# Altium PCB protoboard.PcbDoc
Units mm, origin at the board's own origin, x right, y up, seen from the top; angles counter-clockwise.
Board outline 43.18 x 43.18 mm, 2 copper layers (Component Side, Bottom Layer), stack 0.325 mm thick; 58 components, 38 nets, 245 pads, 48 vias.
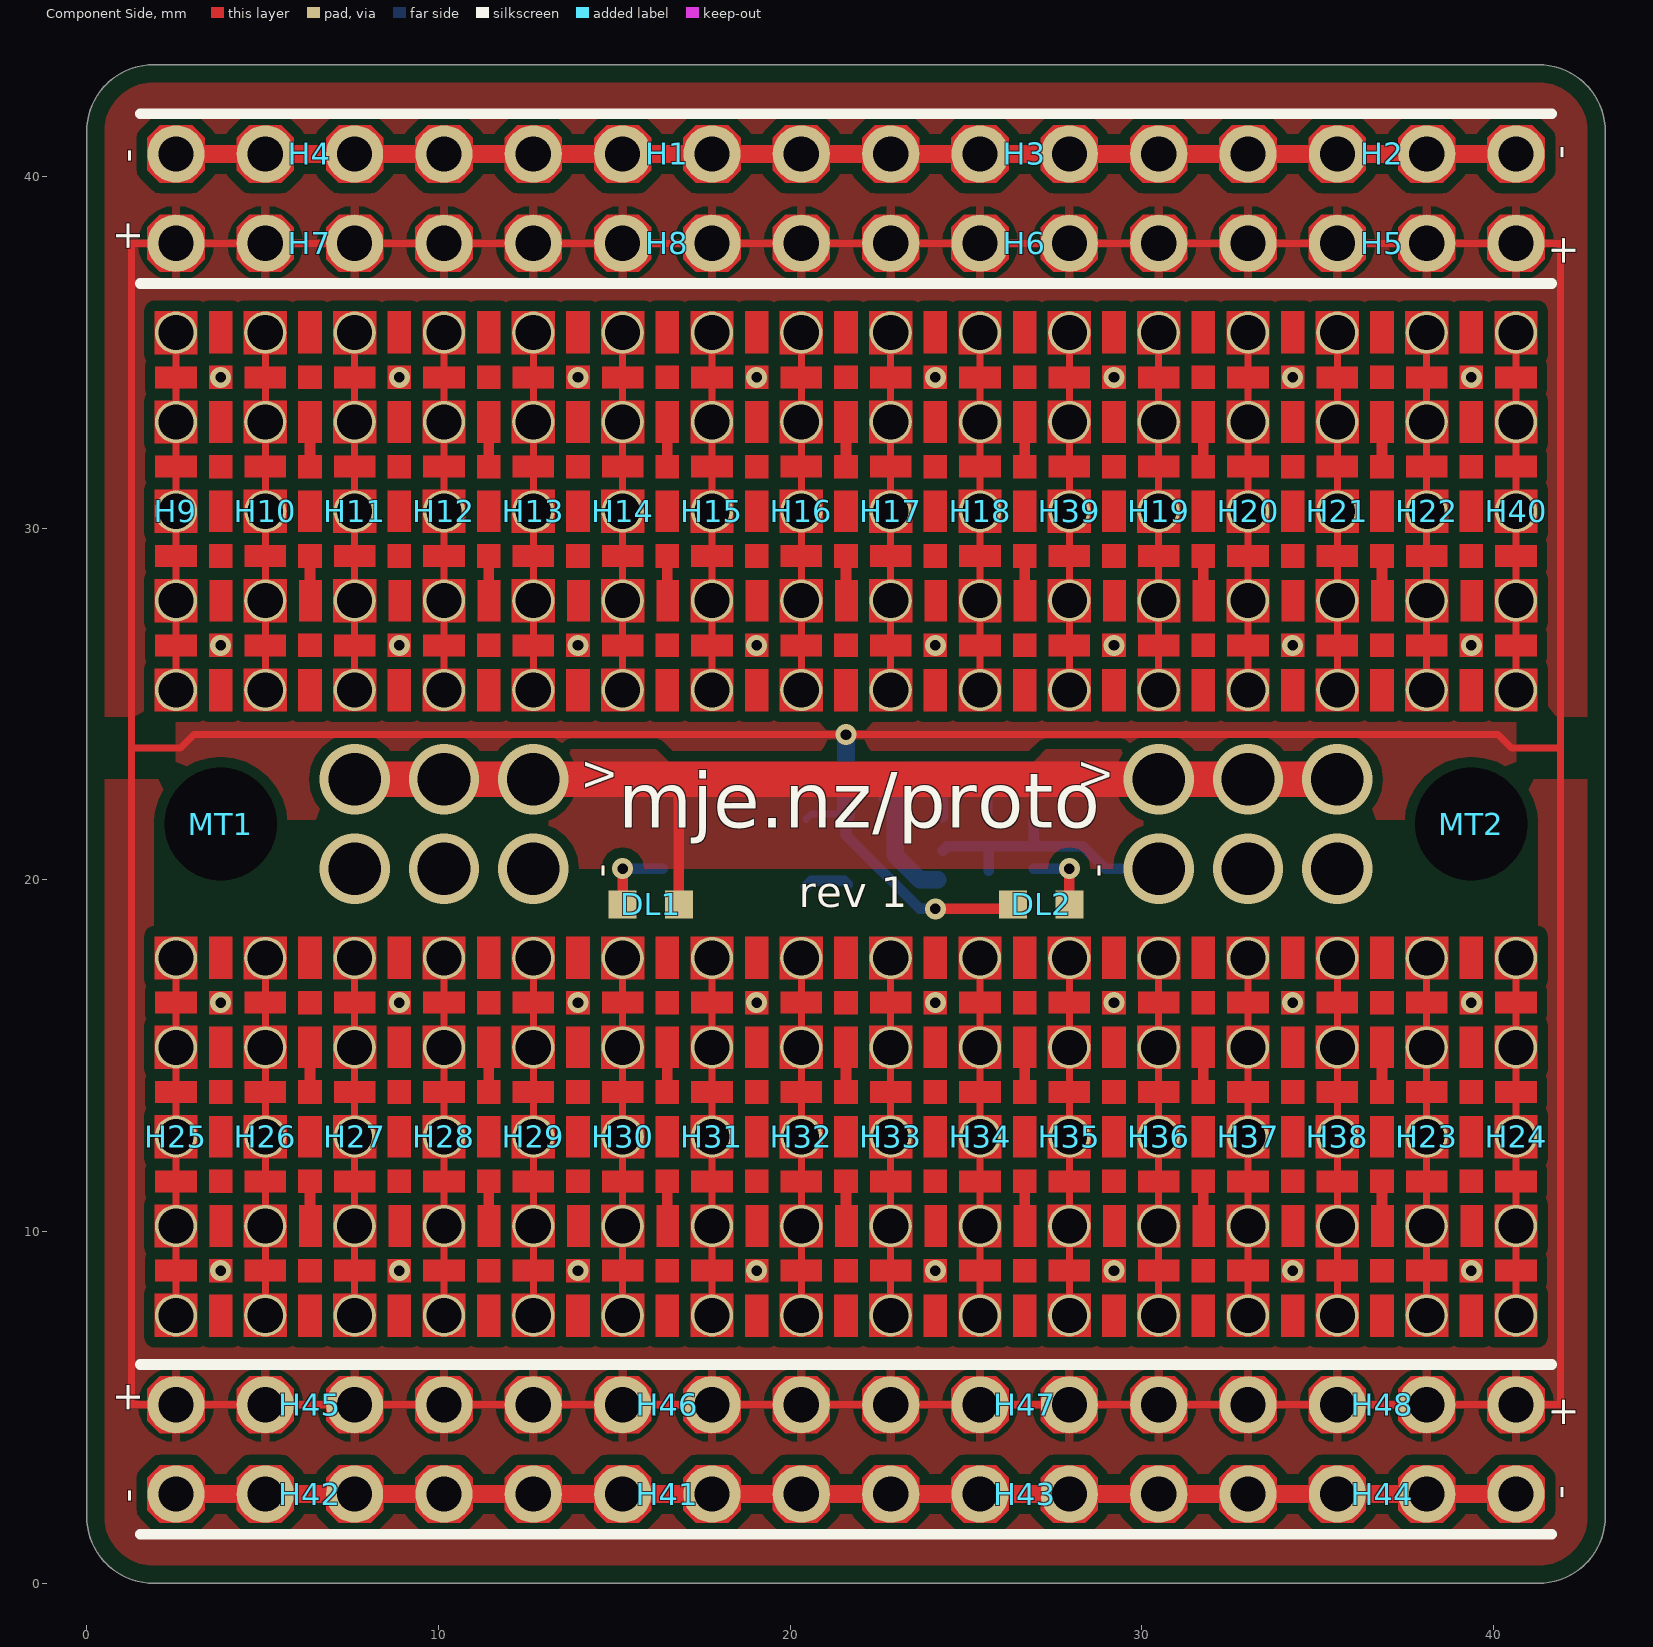
[diagram p0: Component Side view]
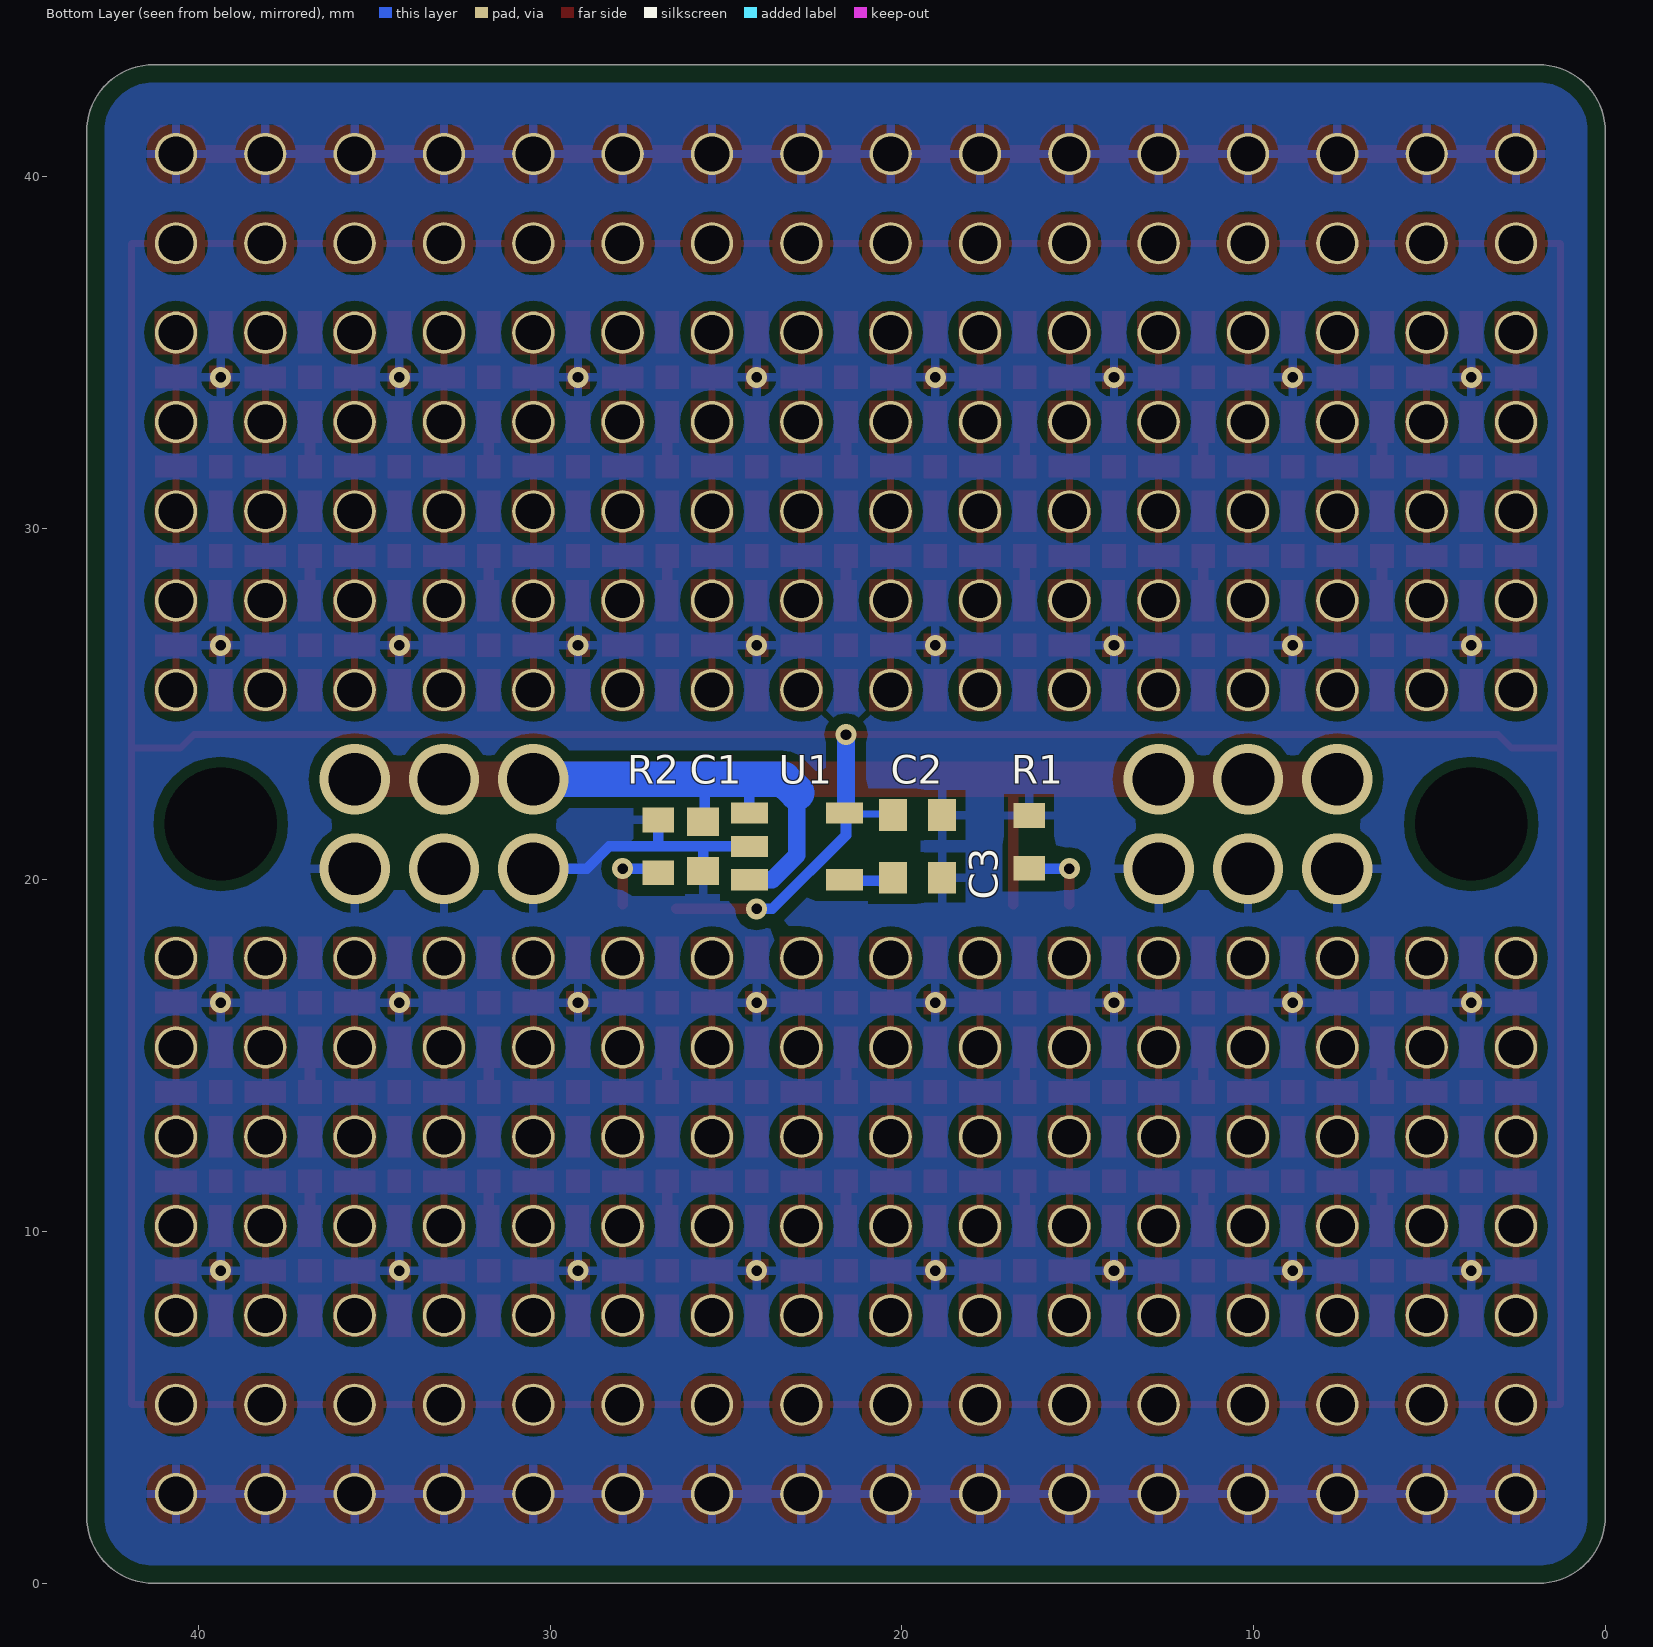
[diagram p1: Bottom Layer view, seen from below]

## Layer stack, top to bottom
Top Solder: solder mask 0.0102, Solder Resist, Dk 3.5
Component Side: signal copper 0.0356
Dielectric 1: core 0.254, FR-4, Dk 4.2
Bottom Layer: signal copper 0.0356
Solder Side: solder mask 0.0102, Solder Resist, Dk 3.5

## Board outline
1.905,0 cw(c1.905,1.905) 0,1.905 0,41.275 cw(c1.905,41.275) 1.905,43.18 41.275,43.18 cw(c41.275,41.275) 43.18,41.275 43.18,1.905 cw(c41.275,1.905) 41.275,0

## Design rules (kind name [scope] priority, off if disabled: settings)
BoardOutlineClearance BoardOutlineClearance_Polygons [IsPolygon] p1: gap=0.5
BoardOutlineClearance BoardOutlineClearance_JLC_Vscore [All] p2 off: gap=0.4 // For V-scored panels
BoardOutlineClearance BoardOutlineClearance_JLC [All] p3: gap=0.2 // For routed boards
Clearance Clearance_Polygon [InPolygon] p1: gap=0.3
Clearance Min_Clearance_JLC_Multi [All] p2 off: gap=0.089 except(0.127: Arc-THPad Arc-Via Track-THPad Track-Via SMDPad-THPad SMDPad-Via) // For multi-layer boards
Clearance Min_Clearance_JLC [All] p3: gap=0.127 // For single/double-sided boards
FanoutControl Fanout_BGA [IsBGA] p1 off: bgadir=Out bgaviamode=Centered fanoutstyle=Auto fanoutdirection=Alternating viagrid=0.025 // Fanout_BGA (Default Rule)
HoleSize HoleSize_JLC [All] p1: absolutevalues=TRUE maxlimit=10 minlimit=0.3 maxpercent=80.000 minpercent=20.000 // Single/double-sided boards
MinimumAnnularRing MinimumAnnularRing_JLC [All] p1: minimumring=0.076 // For single/double-sided boards
MinimumSolderMaskSliver [All] p1: minsoldermaskwidth=0.25
NetAntennae [All] p1 off: netantennaetolerance=1
PasteMaskExpansion [All] p1 off: expansion=0.2
PlaneClearance [All] p1: clearance=0.5
PolygonConnect [All] p1: connectstyle=Relief reliefconductorwidth=0.254 reliefentries=4 polygonreliefangle="90 Angle" airgapwidth=0.254
RoutingVias [All] p1: holewidth=0.5 width=1 viastyle="Through Hole" minholewidth=0.3 minwidth=0.6 maxholewidth=1 maxwidth=2
SMDNeckDown [All] p1 off: percent=50.000
SMDToCorner [All] p1: distance=98425
SMDToPlane [All] p1: distance=1968504
SilkToSolderMaskClearance SilkscreenOverComponentPads [IsPad] p1: minsilkscreentomaskgap=0.254 clearancetoexposedcopper=TRUE
SolderMaskExpansion [All] p1: expansion=0.1
ViasUnderSMD [All] p1: allowed=FALSE
Width Width_JLC [All] p1: maxlimit=2 minlimit=0.127 preferedwidth=0.3 // Single/double-sided boards
23 further rules are at their usual default settings.

## Components (designator, comment, footprint, x,y, rotation, side; value= is the part's Value field where it differs from the comment)
C1 "1uF" CAPC1608L 25.654,20.955 r90 bottom
C2 "2.2uF" CAPC1608L 19.558,21.844 r0 bottom
C3 "DNP" CAPC1608L 19.558,20.066 r180 bottom
DL1 "Dark Green" WL-SMCW0603 15.24,19.304 r0 top
DL2 "Dark Green" WL-SMCW0603 27.94,19.304 r180 top
H1 "CONN_04" "1X04 hex" 20.32,40.64 r180 top
H2 "CONN_04" "1X04 hex" 40.64,40.64 r180 top
H3 "CONN_04" "1X04 hex" 30.48,40.64 r180 top
H4 "CONN_04" "1X04 hex" 10.16,40.64 r180 top
H5 "CONN_04" "1X04 hex" 40.64,38.1 r180 top
H6 "CONN_04" "1X04 hex" 30.48,38.1 r180 top
H7 "CONN_04" "1X04 hex" 10.16,38.1 r180 top
H8 "CONN_04" "1X04 hex" 20.32,38.1 r180 top
H9 "CONN_05" "1X05 square" 2.54,25.4 r90 top
H10 "CONN_05" "1X05 square" 5.08,25.4 r90 top
H11 "CONN_05" "1X05 square" 7.62,25.4 r90 top
H12 "CONN_05" "1X05 square" 10.16,25.4 r90 top
H13 "CONN_05" "1X05 square" 12.7,25.4 r90 top
H14 "CONN_05" "1X05 square" 15.24,25.4 r90 top
H15 "CONN_05" "1X05 square" 17.78,25.4 r90 top
H16 "CONN_05" "1X05 square" 20.32,25.4 r90 top
H17 "CONN_05" "1X05 square" 22.86,25.4 r90 top
H18 "CONN_05" "1X05 square" 25.4,25.4 r90 top
H19 "CONN_05" "1X05 square" 30.48,25.4 r90 top
H20 "CONN_05" "1X05 square" 33.02,25.4 r90 top
H21 "CONN_05" "1X05 square" 35.56,25.4 r90 top
H22 "CONN_05" "1X05 square" 38.1,25.4 r90 top
H23 "CONN_05" "1X05 square" 38.1,7.62 r90 top
H24 "CONN_05" "1X05 square" 40.64,7.62 r90 top
H25 "CONN_05" "1X05 square" 2.54,7.62 r90 top
H26 "CONN_05" "1X05 square" 5.08,7.62 r90 top
H27 "CONN_05" "1X05 square" 7.62,7.62 r90 top
H28 "CONN_05" "1X05 square" 10.16,7.62 r90 top
H29 "CONN_05" "1X05 square" 12.7,7.62 r90 top
H30 "CONN_05" "1X05 square" 15.24,7.62 r90 top
H31 "CONN_05" "1X05 square" 17.78,7.62 r90 top
H32 "CONN_05" "1X05 square" 20.32,7.62 r90 top
H33 "CONN_05" "1X05 square" 22.86,7.62 r90 top
H34 "CONN_05" "1X05 square" 25.4,7.62 r90 top
H35 "CONN_05" "1X05 square" 27.94,7.62 r90 top
H36 "CONN_05" "1X05 square" 30.48,7.62 r90 top
H37 "CONN_05" "1X05 square" 33.02,7.62 r90 top
H38 "CONN_05" "1X05 square" 35.56,7.62 r90 top
H39 "CONN_05" "1X05 square" 27.94,25.4 r90 top
H40 "CONN_05" "1X05 square" 40.64,25.4 r90 top
H41 "CONN_04" "1X04 hex" 20.32,2.54 r180 top
H42 "CONN_04" "1X04 hex" 10.16,2.54 r180 top
H43 "CONN_04" "1X04 hex" 30.48,2.54 r180 top
H44 "CONN_04" "1X04 hex" 40.64,2.54 r180 top
H45 "CONN_04" "1X04 hex" 10.16,5.08 r180 top
H46 "CONN_04" "1X04 hex" 20.32,5.08 r180 top
H47 "CONN_04" "1X04 hex" 30.48,5.08 r180 top
H48 "CONN_04" "1X04 hex" 40.64,5.08 r180 top
MT1 "M3.2 NPTH" MNT-HOLE_3.2mm_NPTH#1 4.318,21.59 r0 top
MT2 "M3.2 NPTH" MNT-HOLE_3.2mm_NPTH#2 55.88,5.08 r0 top
R1 "1K" RESC1608L 16.383,21.082 r270 bottom
R2 "1K" RESC1608L 26.924,20.955 r270 bottom
U1 "TLV70233DBVR" SOT95P280X145-5N 22.987,20.955 r180 bottom

## Footprints (in the part's own frame and the unit in brackets; to place one, negate y for a bottom-side part, rotate by r counter-clockwise, add the part's x,y. Pads: shape width x height; smd on the part's side, far side on the other; paste and mask are expansions set on the pad)
"1X04 hex" [mil] "1x04 100mil-pitch header with 64mil hex pads"
  round 64 / inner round 47.24 / far side round 47.24 hole 39.37: 1(0,0) 2(100,0) 3(200,0) 4(300,0)
  Component Side region: 332,18 332,-18 318,-32 282,-32 268,-18 268,18 282,32 318,32
  Component Side region: 232,18 232,-18 218,-32 182,-32 168,-18 168,18 182,32 218,32
  Component Side region: 132,18 132,-18 118,-32 82,-32 68,-18 68,18 82,32 118,32
  Component Side region: 32,18 32,-18 18,-32 -18,-32 -32,-18 -32,18 -18,32 18,32
"1X05 square" [mm] "1x05 100mil-pitch header with 50mil square pads"
  round 1.2 hole 1: 1(0,0) 2(2.54,0) 3(5.08,0) 4(7.62,0) 5(10.16,0)
  Component Side region: -0.61,0.61 0.61,0.61 0.61,-0.61 -0.61,-0.61
  Component Side region: 1.93,0.61 3.15,0.61 3.15,-0.61 1.93,-0.61
  Component Side region: 4.47,0.61 5.69,0.61 5.69,-0.61 4.47,-0.61
  Component Side region: 7.01,0.61 8.23,0.61 8.23,-0.61 7.01,-0.61
  Component Side region: 9.55,0.61 10.77,0.61 10.77,-0.61 9.55,-0.61
CAPC1608L [mm] "Chip Capacitor, Body 1.6x0.8mm, IPC High Density"
  rect 0.8x0.9 smd: 1(-0.7,0) 2(0.7,0)
  body extent -0.87,-0.48 0.87,0.48, height 0.85
MNT-HOLE_3.2mm_NPTH#1 [mm] "Mounting Hole 3.2mm non plated"
  round 0 hole 3.2 unplated: 1(-0.508,0)
MNT-HOLE_3.2mm_NPTH#2 [mm] "Mounting Hole 3.2mm non plated"
  round 0 hole 3.2 unplated: 1(-16.51,16.51)
RESC1608L [mm] "Chip Resistor, Body 1.6x0.8mm, IPC High Density"
  rect 0.7x0.9 smd: 1(-0.75,0) 2(0.75,0)
  body extent -0.85,-0.48 0.85,0.48, height 0.9
SOT95P280X145-5N [mm] "SOT23, 5-Leads, Body 2.90x2.80mm, Pitch 0.95mm, IPC Medium Density"
  rect 1.05x0.6 smd: 1(-1.35,0.95) 2(-1.35,0) 3(-1.35,-0.95) 4(1.35,-0.95) 5(1.35,0.95)
  body extent -0.87,-1.52 0.87,1.53, height 1.45
WL-SMCW0603 [mm] "2.4 x 0.8 x 0.7mm LED"
  rect 0.8x0.8 smd: 1(0,0) 2(1.6,0)

## Part data
C1: library part CC_1uF_0603, "CAP CER 1uF Y5V -20% +80% 16V 0603"
C2: library part CC_2.2uF_0603, "CAP CER 2.2uF X5R +-20% 10V 0603"
C3: library part CC_10nF_0603, "CAP CER 10nF X7R +-10% 50V 0603"
DL1 DL2: library part DL_150060GS75000, "LED Dk Green 430mcd 0603 SMD"
H1 H2 H3 H4 H5 H6 H7 H8 H41 H42 H43 H44 H45 H46 H47 H48: "CONN HEADER 4POS 2.54mm VERT_Thru Hole"
H9 H10 H11 H12 H13 H14 H15 H16 H17 H18 H19 H20 H21 H22 H23 H24 H25 H26 H27 H28 H29 H30 H31 H32 H33 H34 H35 H36 H37 H38 H39 H40: "CONN HEADER 5POS 2.54mm VERT_Thru Hole"
MT1 MT2: library part MC_M3.2_HOLE, "Fixing M3.2 Mount Hole NPTH"
R1 R2: library part RS_1K, "RES 1.0K OHM 1/10W 5% 0603 SMD"
U1: library part SV_TLV70233DBVR, "IC REG LDO 3.3V 0.3A SOT23-5"

## Via types
v1: diameter 0.6, hole 0.3, Component Side to Bottom Layer, 36 vias
v2: diameter 2, hole 1.5, Component Side to Bottom Layer, 12 vias

## Nets (pads, with @x,y where several pads share a name; then routed paths per layer and width w, separated by ;. In a path a pad name is that pad's centre, name@x,y a point inside that pad or via, vN(x,y) a via of type N, cw(c..) or ccw(c..) an arc to the next point about the centre after c; other vN are vias at no path point)
GND: C1.1 C2.1 C3.2 H1.1 H1.2 H1.3 H1.4 H2.1 H2.2 H2.3 H2.4 H3.1 H3.2 H3.3 H3.4 H4.1 H4.2 H4.3 H4.4 H41.1 H41.2 H41.3 H41.4 H42.1 H42.2 H42.3 H42.4 H43.1 H43.2 H43.3 H43.4 H44.1 H44.2 H44.3 H44.4 R1.1 R2.1 U1.2 | length 84.1
  Component Side w0.5: H42.4 H42.2 H42.1 H41.4 H41.3 H41.2 H41.1 H43.4 H44.1 ; H4.4 H4.3 H4.2 H4.1 H1.4 H1.3 H1.2 H1.1 H3.4 H2.1
  Bottom Layer w0.3: U1.2@24.337,20.828 24.464,20.955 28.321,20.955 28.956,20.32 v2(30.48,20.32) ; C1.1 25.654,20.955 ; 26.924,20.955 R2.1
  other v1: 3.81,8.89 8.89,8.89 13.97,8.89 19.05,8.89 24.13,8.89 29.21,8.89 34.29,8.89 39.37,8.89 3.81,16.51 8.89,16.51 13.97,16.51 19.05,16.51 24.13,16.51 29.21,16.51 34.29,16.51 39.37,16.51 3.81,26.67 8.89,26.67 13.97,26.67 19.05,26.67 24.13,26.67 29.21,26.67 34.29,26.67 39.37,26.67 3.81,34.29 8.89,34.29 13.97,34.29 19.05,34.29 24.13,34.29 29.21,34.29 34.29,34.29 39.37,34.29
  other v2: 7.62,20.32 10.16,20.32 12.7,20.32 33.02,20.32 35.56,20.32
NetC3_1: C3.1 U1.4 | length 1.3
  Bottom Layer w0.3: C3.1@20.447,19.812 20.61,19.975 21.541,19.975 U1.4@21.637,19.878
NetDL1_1: DL1.1 R1.2 | length 2.2
  Component Side w0.3: DL1.1 v1(15.24,20.32)
  Bottom Layer w0.3: v1(15.24,20.32) R1.2@16.383,20.32
NetDL2_1: DL2.1 R2.2 | length 2
  Component Side w0.3: DL2.1 v1(27.94,20.32)
  Bottom Layer w0.3: R2.2@26.924,20.32 v1(27.94,20.32)
NetH9_1: H9.1 H9.2 H9.3 H9.4 H9.5 | length 10.2
  Component Side w0.2: H9.1 H9.2 H9.3 H9.4 H9.5
NetH10_1: H10.1 H10.2 H10.3 H10.4 H10.5 | length 10.2
  Component Side w0.2: H10.1 H10.2 H10.3 H10.4 H10.5
NetH11_1: H11.1 H11.2 H11.3 H11.4 H11.5 | length 10.2
  Component Side w0.2: H11.1 H11.2 H11.3 H11.4 H11.5
NetH12_1: H12.1 H12.2 H12.3 H12.4 H12.5 | length 10.2
  Component Side w0.2: H12.1 H12.2 H12.3 H12.4 H12.5
NetH13_1: H13.1 H13.2 H13.3 H13.4 H13.5 | length 10.2
  Component Side w0.2: H13.1 H13.2 H13.3 H13.4 H13.5
NetH14_1: H14.1 H14.2 H14.3 H14.4 H14.5 | length 10.2
  Component Side w0.2: H14.1 H14.2 H14.3 H14.4 H14.5
NetH15_1: H15.1 H15.2 H15.3 H15.4 H15.5 | length 10.2
  Component Side w0.2: H15.1 H15.2 H15.3 H15.4 H15.5
NetH16_1: H16.1 H16.2 H16.3 H16.4 H16.5 | length 10.2
  Component Side w0.2: H16.1 H16.2 H16.3 H16.4 H16.5
NetH17_1: H17.1 H17.2 H17.3 H17.4 H17.5 | length 10.2
  Component Side w0.2: H17.1 H17.2 H17.3 H17.4 H17.5
NetH18_1: H18.1 H18.2 H18.3 H18.4 H18.5 | length 10.2
  Component Side w0.2: H18.1 H18.2 H18.3 H18.4 H18.5
NetH19_1: H19.1 H19.2 H19.3 H19.4 H19.5 | length 10.2
  Component Side w0.2: H19.1 H19.2 H19.3 H19.4 H19.5
NetH20_1: H20.1 H20.2 H20.3 H20.4 H20.5 | length 10.2
  Component Side w0.2: H20.1 H20.2 H20.3 H20.4 H20.5
NetH21_1: H21.1 H21.2 H21.3 H21.4 H21.5 | length 10.2
  Component Side w0.2: H21.1 H21.2 H21.3 H21.4 H21.5
NetH22_1: H22.1 H22.2 H22.3 H22.4 H22.5 | length 10.2
  Component Side w0.2: H22.1 H22.2 H22.3 H22.4 H22.5
NetH23_1: H23.1 H23.2 H23.3 H23.4 H23.5 | length 10.2
  Component Side w0.2: H23.1@38.049,7.569 H23.1 H23.2 H23.3 H23.4 H23.5
NetH24_1: H24.1 H24.2 H24.3 H24.4 H24.5 | length 10.2
  Component Side w0.2: H24.1@40.589,7.569 H24.1 H24.2 H24.3 H24.4 H24.5
NetH25_1: H25.1 H25.2 H25.3 H25.4 H25.5 | length 10.2
  Component Side w0.2: H25.1 H25.2 H25.3 H25.4 H25.5 H25.5@2.591,17.831
NetH26_1: H26.1 H26.2 H26.3 H26.4 H26.5 | length 10.2
  Component Side w0.2: H26.1 H26.2 H26.3 H26.4 H26.5
NetH27_1: H27.1 H27.2 H27.3 H27.4 H27.5 | length 10.2
  Component Side w0.2: H27.1@7.569,7.569 H27.1 H27.2 H27.3 H27.4 H27.5
NetH28_1: H28.1 H28.2 H28.3 H28.4 H28.5 | length 10.2
  Component Side w0.2: H28.1@10.109,7.569 H28.1 H28.2 H28.3 H28.4 H28.5
NetH29_1: H29.1 H29.2 H29.3 H29.4 H29.5 | length 10.2
  Component Side w0.2: H29.1@12.649,7.569 H29.1 H29.2 H29.3 H29.4 H29.5
NetH30_1: H30.1 H30.2 H30.3 H30.4 H30.5 | length 10.2
  Component Side w0.2: H30.1@15.189,7.569 H30.1 H30.2 H30.3 H30.4 H30.5
NetH31_1: H31.1 H31.2 H31.3 H31.4 H31.5 | length 10.2
  Component Side w0.2: H31.1@17.729,7.569 H31.1 H31.2 H31.3 H31.4 H31.5
NetH32_1: H32.1 H32.2 H32.3 H32.4 H32.5 | length 10.2
  Component Side w0.2: H32.1@20.269,7.569 H32.1 H32.2 H32.3 H32.4 H32.5
NetH33_1: H33.1 H33.2 H33.3 H33.4 H33.5 | length 10.2
  Component Side w0.2: H33.1@22.809,7.569 H33.1 H33.2 H33.3 H33.4 H33.5
NetH34_1: H34.1 H34.2 H34.3 H34.4 H34.5 | length 10.2
  Component Side w0.2: H34.1@25.349,7.569 H34.1 H34.2 H34.3 H34.4 H34.5
NetH35_1: H35.1 H35.2 H35.3 H35.4 H35.5 | length 10.3
  Component Side w0.2: H35.5 H35.4 H35.3 H35.2 H35.1 ; H35.1 27.889,7.569 H35.1
NetH36_1: H36.1 H36.2 H36.3 H36.4 H36.5 | length 10.2
  Component Side w0.2: H36.1@30.429,7.569 H36.1 H36.2 H36.3 H36.4 H36.5
NetH37_1: H37.1 H37.2 H37.3 H37.4 H37.5 | length 10.2
  Component Side w0.2: H37.1@32.969,7.569 H37.1 H37.2 H37.3 H37.4 H37.5
NetH38_1: H38.1 H38.2 H38.3 H38.4 H38.5 | length 10.2
  Component Side w0.2: H38.1@35.509,7.569 H38.1 H38.2 H38.3 H38.4 H38.5
NetH39_1: H39.1 H39.2 H39.3 H39.4 H39.5 | length 10.2
  Component Side w0.2: H39.1 H39.2 H39.3 H39.4 H39.5
NetH40_1: H40.1 H40.2 H40.3 H40.4 H40.5 | length 10.2
  Component Side w0.2: H40.1 H40.2 H40.3 H40.4 H40.5
VCC: C2.2 DL2.2 H5.1 H5.2 H5.3 H5.4 H6.1 H6.2 H6.3 H6.4 H7.1 H7.2 H7.3 H7.4 H8.1 H8.2 H8.3 H8.4 H45.1 H45.2 H45.3 H45.4 H46.1 H46.2 H46.3 H46.4 H47.1 H47.2 H47.3 H47.4 H48.1 H48.2 H48.3 H48.4 U1.5 | length 198
  Component Side w0.2: H7.4@2.413,38.1 1.27,38.1 1.27,23.749 ; H7.4 H7.3 H7.2 H7.1 H8.4 H8.3 H8.2 H8.1 H6.4 H6.3 H6.2 H6.1 H5.4 H5.3 H5.2 H5.1 41.91,38.1 41.91,23.749 ; 1.27,23.749 1.27,5.08 H45.4 H45.3 H45.2 H45.1 H46.4 H46.3 H46.2 H46.1 H47.4 H47.3 H47.2 H47.1 H48.4 H48.3 H48.2 H48.1 41.91,5.08 41.91,23.749 ; 1.27,23.749 2.667,23.749 3.048,24.13 40.132,24.13 40.513,23.749 41.91,23.749
  Component Side w0.3: v1(24.13,19.177) DL2.2@26.416,19.177
  Bottom Layer w0.2: C2.2@20.447,21.717 20.605,21.875 21.59,21.875 U1.5@21.637,21.875
  Bottom Layer w0.3: U1.5 21.637,21.875 21.59,21.828 21.59,21.269 23.682,19.177 v1(24.13,19.177)
  Bottom Layer w0.5: U1.5@21.59,21.844 21.59,21.875 v1(21.59,24.13)
VIN: C1.2 DL1.2 U1.1 U1.3 | length 44.3
  Component Side w0.3: DL1.2 16.84,22.682
  Component Side w1: v2(7.62,22.86) v2(10.16,22.86) v2(12.7,22.86) v2(30.48,22.86) v2(33.02,22.86) v2(35.56,22.86)
  Bottom Layer w0.3: U1.1@24.337,21.778 24.337,22.813 ; C1.2@25.607,21.778 25.607,22.813
  Bottom Layer w0.5: 22.987,22.479 22.987,20.701 23.685,20.002 U1.3@24.194,20.002
  Bottom Layer w1: 22.987,22.479 23.368,22.86 v2(30.48,22.86)
pads on no net: MT1.1 MT2.1
copper on no net: | length 35.6
  Component Side w0.3: 6.35,10.16 6.35,11.43 ; 6.35,13.97 6.35,15.24 ; 6.35,27.94 6.35,29.21 ; 6.35,31.75 6.35,33.02 ; 11.43,10.16 11.43,11.43 ; 11.43,13.97 11.43,15.24 ; 11.43,27.94 11.43,29.21 ; 11.43,31.75 11.43,33.02 ; 16.51,10.16 16.51,11.43 ; 16.51,13.97 16.51,15.24 ; 16.51,27.94 16.51,29.21 ; 16.51,31.75 16.51,33.02 ; 21.59,10.16 21.59,11.43 ; 21.59,13.97 21.59,15.24 ; 21.59,27.94 21.59,29.21 ; 21.59,31.75 21.59,33.02 ; 26.67,10.16 26.67,11.43 ; 26.67,13.97 26.67,15.24 ; 26.67,27.94 26.67,29.21 ; 26.67,31.75 26.67,33.02 ; 31.75,10.16 31.75,11.43 ; 31.75,13.97 31.75,15.24 ; 31.75,27.94 31.75,29.21 ; 31.75,31.75 31.75,33.02 ; 36.83,10.16 36.83,11.43 ; 36.83,13.97 36.83,15.24 ; 36.83,27.94 36.83,29.21 ; 36.83,31.75 36.83,33.02

## Polygon pours and split planes (outlines as drawn)
VIN on Component Side "VIN_L01_P004" (solid, pour order 4): 7.036,24.028 15.875,24.028 17.551,22.352 25.908,22.352 27.584,24.028 36.144,24.028 36.144,20.32 7.036,20.32
VCC on Component Side "VCC_L01_P005" (solid, pour order 5): 1.905,0 cw(c1.905,1.905) 0,1.905 0,41.275 cw(c1.905,41.275) 1.905,43.18 41.275,43.18 cw(c41.275,41.275) 43.18,41.275 43.18,1.905 cw(c41.275,1.905) 41.275,0
GND on Bottom Layer "GND_L02_P006" (solid, pour order 6): 1.905,0 cw(c1.905,1.905) 0,1.905 0,41.275 cw(c1.905,41.275) 1.905,43.18 41.275,43.18 cw(c41.275,41.275) 43.18,41.275 43.18,1.905 cw(c41.275,1.905) 41.275,0

## Other copper
Component Side:
  drawing of 418 lines, arcs and shapes, not listed

## Silkscreen, mask and mechanical layers (free items; w line width, h text height)
Top Overlay:
  lines w0.3: 1.524,1.397 41.656,1.397 ; 1.524,6.223 41.656,6.223 ; 1.524,36.957 41.656,36.957 ; 1.524,41.783 41.656,41.783
  text "-" at 41.656,40.894 h0.81 r270
  text "-" at 1.524,40.386 h0.81 r90
  text "+" at 41.656,38.354 h0.81 r270
  text "+" at 1.524,37.846 h0.81 r90
  text "V" at 14.986,22.606 h0.81 r90
  text "V" at 29.083,22.606 h0.81 r90
  text "mje.nz/proto" at 15.113,20.955 h2.7
  text "-" at 14.986,20.066 h0.81 r90
  text "-" at 29.083,20.066 h0.81 r90
  text "rev 1" at 20.244,18.923 h1.5
  text "+" at 41.656,5.334 h0.81 r270
  text "+" at 1.524,4.826 h0.81 r90
  text "-" at 41.656,2.794 h0.81 r270
  text "-" at 1.524,2.286 h0.81 r90
PCB Boundary:
  the board outline again, w0.3
Drill Drawing:
  text ".LEGEND" at 46.9,5.08 h1.52
  text "Drill Drawing." at 46.9,2.54 h1.52

## Dimensions
0,43.18 to 0,0 on Dimension
43.18,0 to 0,0 on Dimension